# Altium PCB 转接板.PcbDoc
Units mil, origin at the board's own origin, x right, y up, seen from the top; angles counter-clockwise.
Board outline 1968.5 x 1968.5 mil, 2 copper layers (Top Layer, Bottom Layer); 7 components, 9 nets, 101 pads, 30 vias.
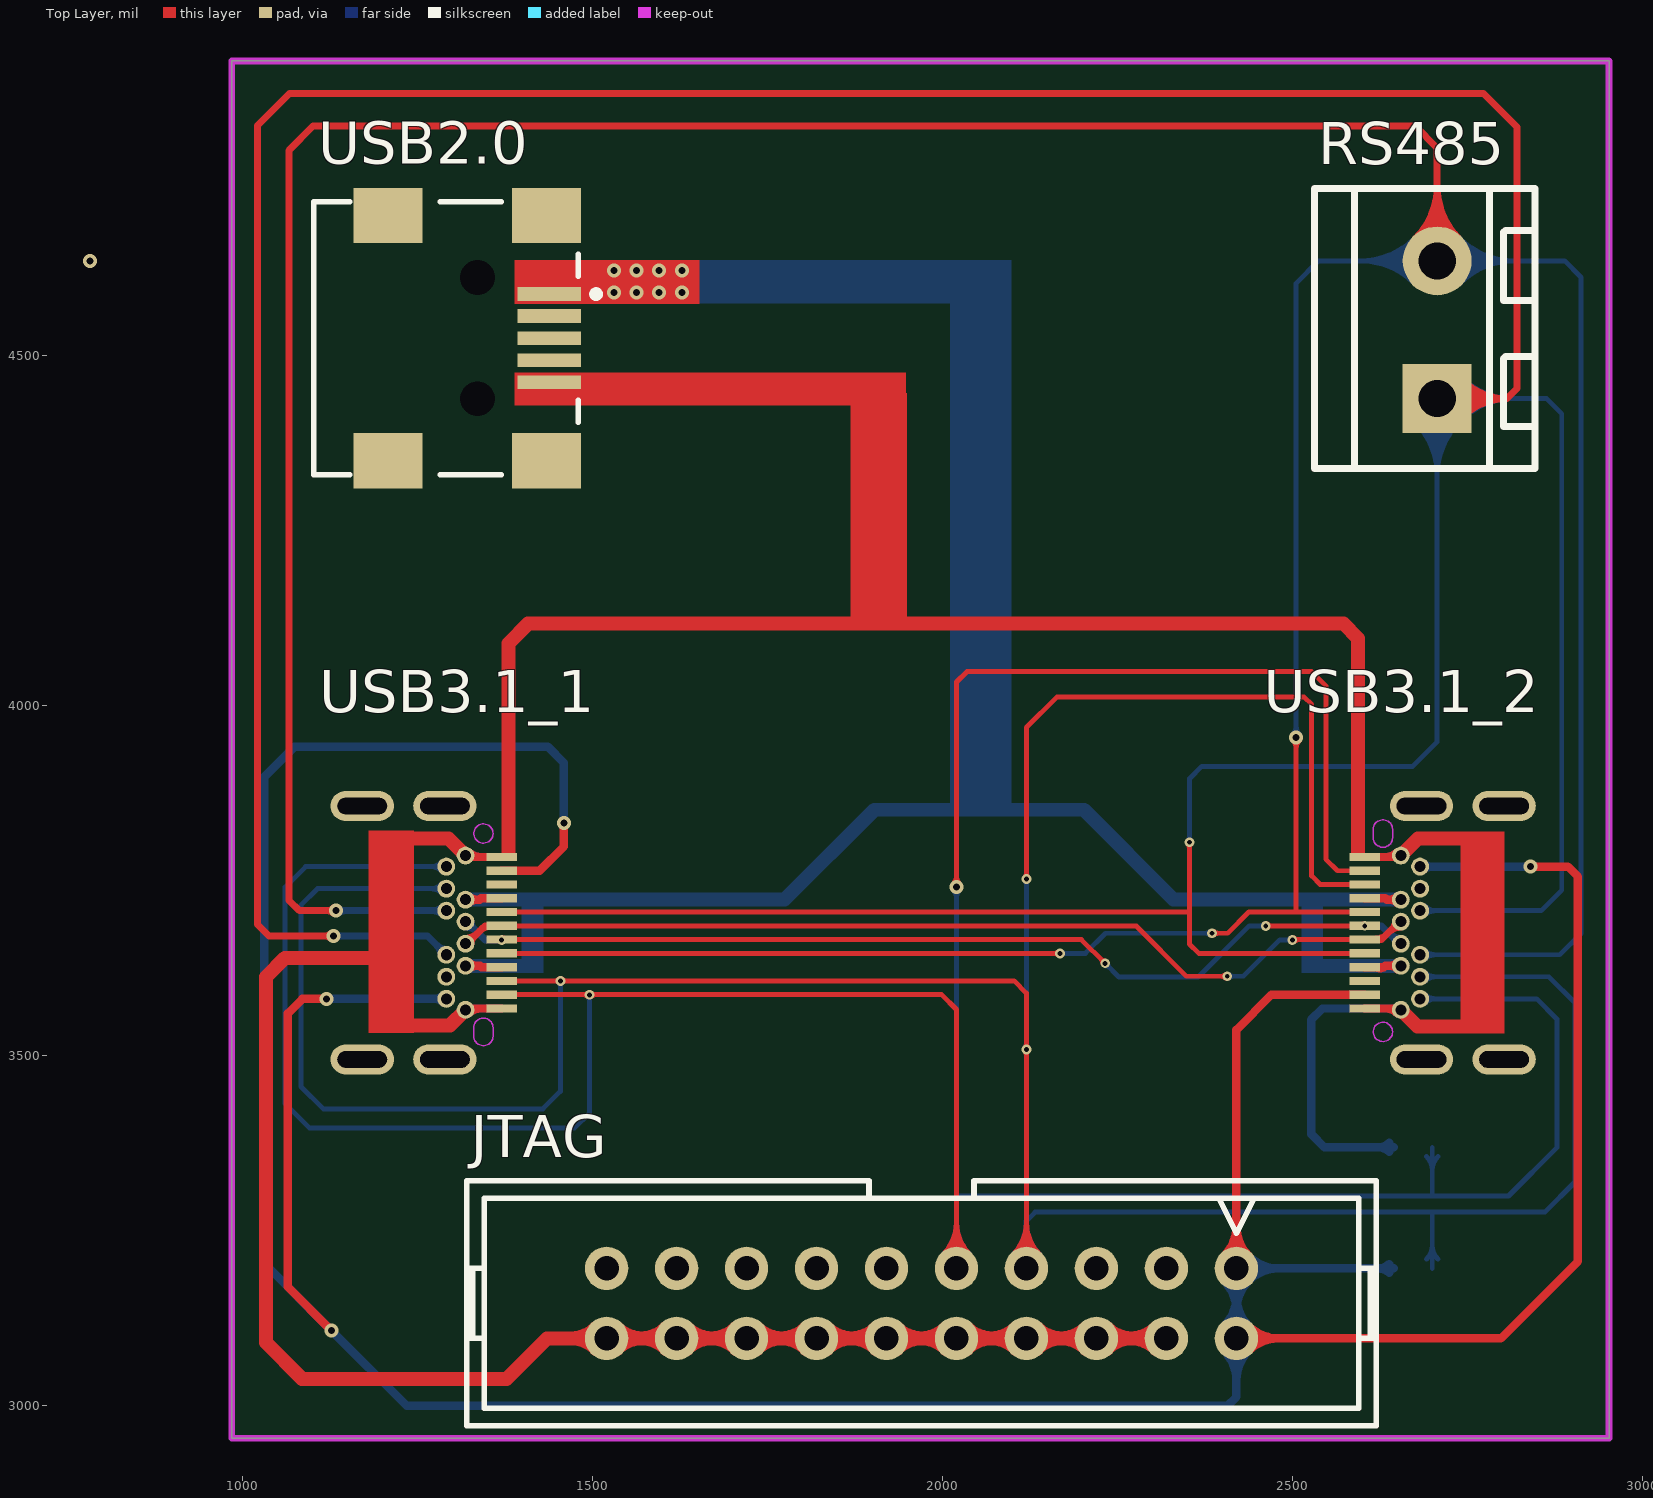
[diagram p0: Top Layer view]
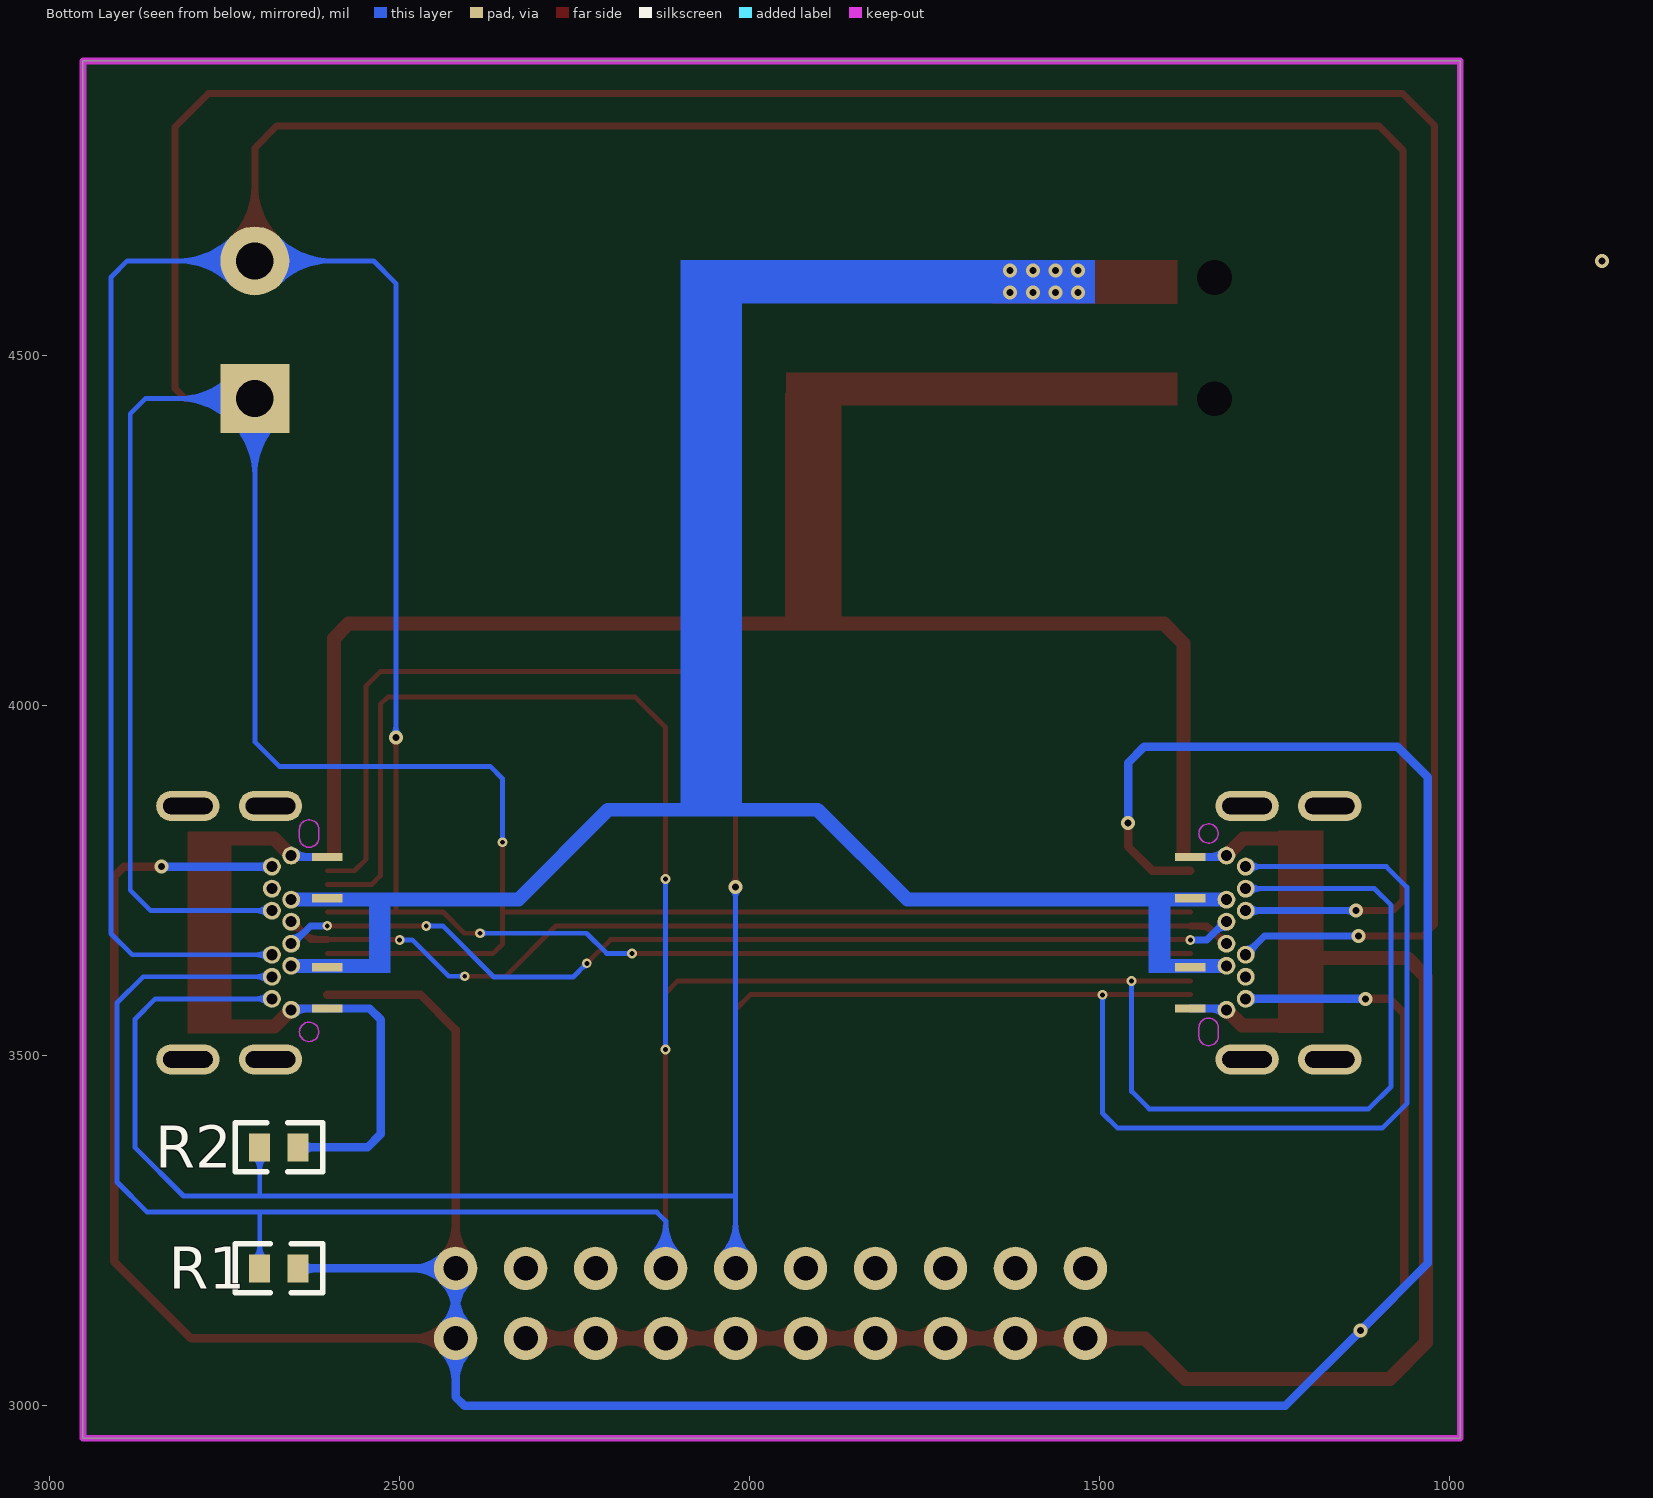
[diagram p1: Bottom Layer view, seen from below]

## Layer stack, top to bottom
Top Layer: signal copper 1.4
Dielectric: dielectric 12.6, FR-4, Dk 4.8
Bottom Layer: signal copper 1.4

## Board outline
984.25,2952.76 2952.76,2952.76 2952.76,4921.26 984.25,4921.26

## Design rules (kind name [scope] priority, off if disabled: settings)
Clearance [All] p1: gap=5.9
ComponentClearance [All] p1: gap=0 collisioncheckmode=3 verticalgap=0 showdistances=FALSE
HoleSize [All] p1: absolutevalues=TRUE maxlimit=200 minlimit=1 maxpercent=80.000 minpercent=20.000
HoleToHoleClearance [All] p1: gap=0 allowstackedmicrovias=TRUE
MinimumSolderMaskSliver [All] p1: minsoldermaskwidth=0
PolygonConnect [All] p1: connectstyle=Relief reliefconductorwidth=10 reliefentries=4 polygonreliefangle="90 Angle"
RoutingCorners [All] p1: cornerstyle=45-Degree minsetback=100 maxsetback=50
RoutingVias [All] p1: holewidth=10 width=20 viastyle="Through Hole" minholewidth=7 minwidth=10 maxholewidth=28 maxwidth=50
SilkToSilkClearance [All] p1: silktosilkclearance=0
SilkscreenOverComponentPads [All] p1: minsilkscreentomaskgap=0
SolderMaskExpansion [All] p1: expansion=4
TestPointUsage [All] p1: valid=0 allowmultiple=FALSE
Testpoint [All] p1: side=15 testpointundercomponent=TRUE minsize=40 maxsize=100 preferedsize=60 minholesize=0 maxholesize=40 preferedholesize=32 testpointgrid=1 style=1023 order=0123456789
Width [All] p1: maxlimit=100 minlimit=6 preferedwidth=10
17 further rules are at their usual default settings.

## Components (designator, comment, footprint, x,y, rotation, side; value= is the part's Value field where it differs from the comment)
JTAG "Header 10X2" JTAG_20 1970,3145.5 r180 top
R1 "Res2" 0603 2645,3195.5 r0 bottom
R2 "Res2" 0603 2700,3368.5 r180 bottom
RS485 "PIN2" HEAD2L-0.8 2707,4438.57 r90 top
USB2.0 "USB" USB/SM0.8-6H5 1128.99,4525 r180 top
USB3.1_1 "USB3.1 TYPEC" "MicroUSB TypeC 3.1 - duplicate" 1344,3783.54 r270 top
USB3.1_2 "USB3.1 TYPEC" "MicroUSB TypeC 3.1 - duplicate" 2629.5,3567 r90 top

## Footprints (in the part's own frame and the unit in brackets; to place one, negate y for a bottom-side part, rotate by r counter-clockwise, add the part's x,y. Pads: shape width x height; smd on the part's side, far side on the other; paste and mask are expansions set on the pad)
0603 [mil]
  rect 30x40 smd: 1(0,0) 2(55,0)
  silkscreen extent -35,-35 90,35
HEAD2L-0.8 [mm]
  rect 2.5x2.5 hole 1.35: 1(0,0)
  round 2.5 hole 1.35: 2(5,0)
  silkscreen extent -2.54,-3.56 7.62,4.45
JTAG_20 [mil]
  round 62 hole 35: 1(-450,-50) 2(-450,50) 3(-350,-50) 4(-350,50) 5(-250,-50) 6(-250,50) 7(-150,-50) 8(-150,50) 9(-50,-50) 10(-50,50) 11(50,-50) 12(50,50) 13(150,-50) 14(150,50) 15(250,-50) 16(250,50) 17(350,-50) 18(350,50) 19(450,-50) 20(450,50)
  silkscreen extent -650,-175 650,175
"MicroUSB TypeC 3.1 - duplicate" [mm]
  rect 0.3x1.1 smd far side: 1(0,0.66) 4(1.5,0.66) 9(4,0.66) 12(5.5,0.66)
  rect 0.3x1.1 smd: 1(0,0.66) 2(0.5,0.66) 3(1,0.66) 4(1.5,0.66) 5(2,0.66) 6(2.5,0.66) 7(3,0.66) 8(3.5,0.66) 9(4,0.66) 10(4.5,0.66) 11(5,0.66) 12(5.5,0.66)
  round 0.65 hole 0.4: 13(-0.05,-0.65) 14(0.35,-1.35) 15(1.15,-1.35) 16(1.55,-0.65) 17(1.95,-1.35) 18(2.35,-0.65) 19(3.15,-0.65) 20(3.55,-1.35) 21(3.95,-0.65) 22(4.35,-1.35) 23(5.15,-1.35) 24(5.55,-0.65)
  oval 1.1x2.3 hole 0.6 slot 1.8 at 90 deg: ""(-1.85,-1.4) ""(-1.85,-4.4) ""(7.35,-1.4) ""(7.35,-4.4)
  Keep-Out Layer circle w0.05: c-0.85,0 r0.35
  Keep-Out Layer lines w0.05: 6.5,-0.35 ccw(c6.5,0) 6.5,0.35 6.2,0.35 ccw(c6.2,0) 6.2,-0.35 6.5,-0.35
USB/SM0.8-6H5 [mm]
  rect 2.3x0.5 smd: 1(-7.85,-1.6) 2(-7.85,-0.8) 3(-7.85,0) 4(-7.85,0.8) 5(-7.85,1.6)
  rect 2.5x2 smd: 6(-7.75,4.45) 7(-1.996,4.45) 8(-7.75,-4.45) 9(-1.996,-4.45)
  round 0.6 hole 1.27 unplated: MH1(-5.25,2.2) MH2(-5.25,-2.2)
  silkscreen extent -9.68,-4.95 0.7,4.95

## Part data
JTAG: "Header, 10-Pin, Dual row"
R1 R2: "Resistor"
USB2.0: library part USB5
USB3.1_1 USB3.1_2: library part "USB3.1 TYPEc"

## Via types
v1: diameter 20, hole 10, Top Layer to Bottom Layer, 17 vias
v2: diameter 14, hole 7, Top Layer to Bottom Layer, 13 vias

## Nets (pads, with @x,y where several pads share a name; then routed paths per layer and width w, separated by ;. In a path a pad name is that pad's centre, name@x,y a point inside that pad or via, vN(x,y) a via of type N, cw(c..) or ccw(c..) an arc to the next point about the centre after c; other vN are vias at no path point)
D+: USB3.1_1.6 USB3.1_1.19 USB3.1_2.6 USB3.1_2.19 | length 1571.4
  Top Layer w7: USB3.1_1.6 2277.39,3685.11 ; 2277.39,3684.11 2348.5,3613 v2(2407,3613) ; v2@2404.53,3610.53 ccw(c2398.55,3604.55) 2398.55,3613 ccw(c2398.55,3621.45) v2@2404.53,3615.47 ; v2@2497.43,3665.43 USB3.1_2.6 ; v2@2502.47,3662.53 cw(c2509.48,3655.52) 2509.48,3665.43 ; v2@2502.47,3667.47 ccw(c2507.42,3672.42) 2507.42,3665.43
  Top Layer w10: USB3.1_1.19 1320.42,3659.52 1346.01,3685.11 USB3.1_1.6 ; USB3.1_1.19@1318.41,3667.32 ccw(c1318.41,3691) 1335.16,3674.25 ; USB3.1_1.19@1326.2,3659.52 cw(c1340.16,3659.52) 1330.29,3669.39 ; 1338.65,3677.75 cw(c1354.24,3662.17) USB3.1_1.6@1354.24,3684.2 ; 1341.9,3681 cw(c1350.75,3672.15) USB3.1_1.6@1354,3684.24 ; USB3.1_2.6 2627.49,3665.43 2653.08,3691.02 USB3.1_2.19 ; USB3.1_2.6@2619.26,3666.33 ccw(c2619.26,3688.37) 2634.85,3672.78 ; 2638.34,3676.28 cw(c2655.09,3659.54) USB3.1_2.19@2655.09,3683.22 ; 2643.21,3681.15 ccw(c2633.34,3691.02) USB3.1_2.19@2647.3,3691.02
  Bottom Layer w7: v2(2407,3613) 2430,3613 2482,3665 v2(2500,3665) ; v2@2409.47,3610.53 cw(c2415.45,3604.55) 2415.45,3613 cw(c2415.45,3621.45) v2@2409.47,3615.47 ; v2@2497.53,3662.53 ccw(c2491.55,3656.55) 2491.55,3665 ccw(c2491.55,3673.45) v2@2497.53,3667.47
D-: USB3.1_1.7 USB3.1_1.18 USB3.1_2.7 USB3.1_2.18 | length 1557.1
  Top Layer w7: USB3.1_1.7 1918,3665.43 ; USB3.1_1.7@1372.47,3662.53 cw(c1379.48,3655.52) USB3.1_1.7@1379.48,3665.43 ; USB3.1_1.7@1372.47,3667.47 ccw(c1377.42,3672.42) USB3.1_1.7@1377.42,3665.43 ; 1925.93,3665.43 1918,3665.43 ; v2@2229,3631.5 ccw(c2220.55,3631.5) 2226.53,3637.47 ccw(c2232.5,3643.45) v2@2232.5,3635 ; v2(2232.5,3631.5) 2198.57,3665.43 1918,3665.43 ; v2@2462,3685.11 v2(2603.52,3685.11) ; v2@2464.47,3682.53 cw(c2470.72,3676.28) 2470.72,3685.11 ; v2@2464.47,3687.47 ccw(c2470.18,3693.18) 2470.18,3685.11 ; USB3.1_2.7@2601.04,3682.64 ccw(c2595.07,3676.66) 2595.07,3685.11 ccw(c2595.07,3693.56) USB3.1_2.7@2601.04,3687.59
  Bottom Layer w7: v2@2232.5,3628 cw(c2232.5,3619.55) 2238.47,3625.53 cw(c2244.45,3631.5) v2@2236,3631.5 ; v2(2232.5,3631.5) 2252,3612 2365.5,3612 2438.5,3685 v2(2462,3685) ; v2@2459.53,3682.53 ccw(c2453.55,3676.55) 2453.55,3685 ccw(c2453.55,3693.45) v2@2459.53,3687.47
  Bottom Layer w10: USB3.1_1.18@1318.41,3683.22 cw(c1318.41,3659.39) 1335.26,3676.24 ; USB3.1_1.18 1320.48,3691.02 1346.5,3665 v2(1370,3665) ; USB3.1_1.18@1326.2,3691.02 ccw(c1340.02,3691.02) 1330.25,3681.25 ; v2(2603.52,3685.11) 2627.49,3685.11 2653.08,3659.52 USB3.1_2.18 ; 2638.34,3674.25 ccw(c2655.09,3691) USB3.1_2.18@2655.09,3667.32 ; 2643.21,3669.39 cw(c2633.34,3659.52) USB3.1_2.18@2647.3,3659.52
GND: JTAG.4 JTAG.6 JTAG.8 JTAG.10 JTAG.12 JTAG.14 JTAG.16 JTAG.18 JTAG.20 R2.2 USB2.0.5 USB3.1_1.1 USB3.1_1.12 USB3.1_1.13 USB3.1_1.24 USB3.1_2.1 USB3.1_2.12 USB3.1_2.13 USB3.1_2.24 | length 6659.7
  Top Layer w12: USB3.1_1.13 1320.38,3783.54 USB3.1_1.1@1369.98,3783.54 ; USB3.1_1.24@1319,3565.62 USB3.1_1.24 1320.38,3567 USB3.1_1.12@1369.98,3567 ; USB3.1_1.24@1323.21,3560.23 cw(c1339.57,3543.87) 1339.57,3567 ; USB3.1_1.13@1323.21,3790.31 ccw(c1339.57,3806.66) 1339.57,3783.54 ; USB3.1_2.1@2603.52,3567 2653.12,3567 USB3.1_2.13 ; USB3.1_2.12@2603.52,3783.54 2653.12,3783.54 USB3.1_2.24 ; 2633.93,3567 cw(c2633.93,3543.87) USB3.1_2.13@2650.29,3560.23 ; 2633.93,3783.54 ccw(c2633.93,3806.66) USB3.1_2.24@2650.29,3790.31
  Top Layer w20: 1201.5,3639 1060,3639 1033,3612 1033,3089.5 1085,3037.5 1377,3037.5 1435,3095.5 JTAG.18 JTAG.14 JTAG.12 JTAG.10 JTAG.8 JTAG.4 ; 1237,3810 1293.91,3810 USB3.1_1.13 ; 1240,3543 1296.38,3543 USB3.1_1.24 ; USB3.1_1.1@1379.66,3787.71 1379.66,4088.66 1408,4117 2573,4117 2594,4096 USB3.1_2.12@2594,3788 ; JTAG.20@1505.15,3080.65 ccw(c1469.3,3044.8) 1469.3,3095.5 ccw(c1469.3,3146.2) JTAG.20@1505.15,3110.35 ; JTAG.20@1534.85,3080.65 cw(c1570.7,3044.8) 1570.7,3095.5 cw(c1570.7,3146.2) JTAG.20@1534.85,3110.35 ; JTAG.18@1605.15,3080.65 ccw(c1569.3,3044.8) 1569.3,3095.5 ccw(c1569.3,3146.2) JTAG.18@1605.15,3110.35 ; JTAG.18@1634.85,3080.65 cw(c1670.7,3044.8) 1670.7,3095.5 cw(c1670.7,3146.2) JTAG.18@1634.85,3110.35 ; JTAG.16@1705.15,3080.65 ccw(c1669.3,3044.8) 1669.3,3095.5 ccw(c1669.3,3146.2) JTAG.16@1705.15,3110.35 ; JTAG.16@1734.85,3080.65 cw(c1770.7,3044.8) 1770.7,3095.5 cw(c1770.7,3146.2) JTAG.16@1734.85,3110.35 ; JTAG.14@1805.15,3080.65 ccw(c1769.3,3044.8) 1769.3,3095.5 ccw(c1769.3,3146.2) JTAG.14@1805.15,3110.35 ; JTAG.14@1834.85,3080.65 cw(c1870.7,3044.8) 1870.7,3095.5 cw(c1870.7,3146.2) JTAG.14@1834.85,3110.35 ; JTAG.12@1905.15,3080.65 ccw(c1869.3,3044.8) 1869.3,3095.5 ccw(c1869.3,3146.2) JTAG.12@1905.15,3110.35 ; JTAG.12@1934.85,3080.65 cw(c1970.7,3044.8) 1970.7,3095.5 cw(c1970.7,3146.2) JTAG.12@1934.85,3110.35 ; JTAG.10@2005.15,3080.65 ccw(c1969.3,3044.8) 1969.3,3095.5 ccw(c1969.3,3146.2) JTAG.10@2005.15,3110.35 ; JTAG.10@2034.85,3080.65 cw(c2070.7,3044.8) 2070.7,3095.5 cw(c2070.7,3146.2) JTAG.10@2034.85,3110.35 ; JTAG.8@2105.15,3080.65 ccw(c2069.3,3044.8) 2069.3,3095.5 ccw(c2069.3,3146.2) JTAG.8@2105.15,3110.35 ; JTAG.8@2134.85,3080.65 cw(c2170.7,3044.8) 2170.7,3095.5 cw(c2170.7,3146.2) JTAG.8@2134.85,3110.35 ; JTAG.6@2205.15,3080.65 ccw(c2169.3,3044.8) 2169.3,3095.5 ccw(c2169.3,3146.2) JTAG.6@2205.15,3110.35 ; JTAG.6@2234.85,3080.65 cw(c2270.7,3044.8) 2270.7,3095.5 cw(c2270.7,3146.2) JTAG.6@2234.85,3110.35 ; JTAG.4@2305.15,3080.65 ccw(c2269.3,3044.8) 2269.3,3095.5 ccw(c2269.3,3146.2) JTAG.4@2305.15,3110.35 ; USB3.1_2.13 2679.12,3541 2784.5,3541 ; USB3.1_2.24 2679.59,3810 2782,3810
  Bottom Layer w12: USB3.1_1.24 1320.38,3567 USB3.1_1.12@1369.98,3567 ; USB3.1_1.13 1320.38,3783.54 USB3.1_1.1@1369.98,3783.54 ; USB3.1_1.24@1323.21,3560.23 cw(c1339.57,3543.87) 1339.57,3567 ; USB3.1_1.13@1323.21,3790.31 ccw(c1339.57,3806.66) 1339.57,3783.54 ; USB3.1_2.12@2603.52,3783.54 2653.12,3783.54 USB3.1_2.24 ; 2633.93,3567 cw(c2633.93,3543.87) USB3.1_2.13@2650.29,3560.23 ; 2633.93,3783.54 ccw(c2633.93,3806.66) USB3.1_2.24@2650.29,3790.31 ; R2.2@2638.64,3362.14 ccw(c2623.27,3346.77) 2623.27,3368.5 ccw(c2623.27,3390.23) R2.2@2638.64,3374.86 ; R2.2 2546,3368.5 2527,3387.5 2527,3551 2543,3567 2603.52,3567 2653.12,3567 USB3.1_2.13
RS485_A: RS485.1 USB3.1_1.5 USB3.1_1.20 USB3.1_2.5 USB3.1_2.20 | length 8733.9
  Top Layer w7: USB3.1_1.5 2353,3704.8 ; v2@2350.53,3802.03 cw(c2344.55,3796.05) 2353,3796.05 cw(c2361.45,3796.05) v2@2355.47,3802.03 ; 2353,3706 2353,3704.8 ; 2353,3706.5 v2(2353,3804.5) ; USB3.1_2.5 2366.26,3645.74 2353,3659 2353,3704.8
  Top Layer w10: v1@1125.96,3666.96 ccw(c1117.43,3658.43) 1117.43,3670.5 ccw(c1117.43,3682.57) v1@1125.96,3674.04 ; v1(1129.5,3670.5) 1037.5,3670.5 1021,3687 1021,4829 1066.5,4874.5 2773,4874.5 2821,4826.5 2821,4453 2806.57,4438.57 ; RS485.1 2806.57,4438.57 ; RS485.1@2724.97,4422.33 cw(c2761.53,4389.29) 2761.53,4438.57 cw(c2761.53,4487.85) RS485.1@2724.97,4454.8 ; RS485.1@2732.39,4415.62 cw(c2784.04,4368.93) 2784.04,4438.57 cw(c2784.04,4508.2) RS485.1@2732.39,4461.51 ; RS485.1@2739.8,4408.92 cw(c2806.56,4348.58) 2806.56,4438.57 ; RS485.1@2739.8,4468.21 ccw(c2806.56,4528.55) 2806.56,4438.57
  Bottom Layer w7: v2@2350.53,3806.97 ccw(c2344.55,3812.95) 2353,3812.95 ccw(c2361.45,3812.95) v2@2355.47,3806.97 ; v2@2354,3803.5 v2(2353,3804.5) 2353,3895.5 2370.5,3913 2672,3913 2707,3948 RS485.1 2863.43,4438.57 2885,4417 2885,3736 2855.76,3706.76 USB3.1_2.20 ; RS485.1@2674.68,4406.24 cw(c2596.64,4328.21) 2707,4328.21 cw(c2817.36,4328.21) 2739.33,4406.24 cw(c2817.36,4328.21) 2817.36,4438.57 cw(c2817.36,4548.93) RS485.1@2739.33,4470.89 ; RS485.1@2679.63,4411.19 cw(c2613.54,4345.11) 2707,4345.11 cw(c2800.46,4345.11) 2734.38,4411.19 cw(c2800.46,4345.11) 2800.46,4438.57 cw(c2800.46,4532.03) RS485.1@2734.38,4465.94 ; RS485.1@2684.58,4416.14 cw(c2630.44,4362.01) 2707,4362.01 cw(c2783.56,4362.01) 2729.43,4416.14 cw(c2783.56,4362.01) 2783.56,4438.57 cw(c2783.56,4515.13) RS485.1@2729.43,4460.99 ; USB3.1_2.20@2689.22,3700.19 cw(c2705.09,3684.32) 2705.09,3706.76 cw(c2705.09,3729.2) USB3.1_2.20@2689.22,3713.34 ; RS485.1@2689.53,4421.09 cw(c2647.34,4378.9) 2707,4378.9 cw(c2766.67,4378.9) 2724.48,4421.09 cw(c2766.67,4378.9) 2766.67,4438.57 cw(c2766.67,4498.23) RS485.1@2724.48,4456.04
  Bottom Layer w10: v1(1129.5,3670.5) 1264.12,3670.5 USB3.1_1.20 ; v1@1133.04,3666.96 cw(c1141.57,3658.43) 1141.57,3670.5 cw(c1141.57,3682.57) v1@1133.04,3674.04 ; USB3.1_1.20@1283.06,3643.77 ccw(c1264.24,3643.77) 1277.54,3657.08 ccw(c1290.85,3670.39) USB3.1_1.20@1290.85,3651.57
RS485_B: RS485.2 USB3.1_1.8 USB3.1_1.17 USB3.1_2.8 USB3.1_2.17 | length 8562.3
  Top Layer w7: USB3.1_1.8 v2@2168,3645.74 ; 2158.97,3645.74 cw(c2158.97,3636.47) v2@2165.53,3643.03 ; 2160.13,3645.74 ccw(c2160.13,3653.37) v2@2165.53,3647.97 ; v2(2385,3674.5) 2407.5,3674.5 2437.8,3704.8 2505.5,3704.8 ; v2@2387.47,3672.03 cw(c2393.45,3666.05) 2393.45,3674.5 cw(c2393.45,3682.95) v2@2387.47,3676.97 ; v1@2500.9,3949.9 cw(c2489.81,3938.81) 2505.5,3938.81 cw(c2521.19,3938.81) v1@2510.1,3949.9 ; v1(2505.5,3954.5) 2505.5,3704.8 ; USB3.1_2.8 2505.5,3704.8
  Top Layer w10: v1@1129.96,3703.23 ccw(c1121.43,3694.69) 1121.43,3706.76 ccw(c1121.43,3718.84) v1@1129.96,3710.3 ; v1(1133.5,3706.76) 1080.74,3706.76 1066,3721.5 1066,4793.5 1100.5,4828 2676,4828 2707,4797 RS485.2 ; RS485.2@2675.74,4666.68 ccw(c2600.27,4742.16) 2707,4742.16 ccw(c2813.74,4742.16) RS485.2@2738.27,4666.68 ; RS485.2@2682.81,4659.61 ccw(c2624.41,4718.01) 2707,4718.01 ccw(c2789.6,4718.01) RS485.2@2731.2,4659.61 ; RS485.2@2689.88,4652.54 ccw(c2648.55,4693.87) 2707,4693.87 ccw(c2765.46,4693.87) RS485.2@2724.12,4652.54
  Bottom Layer w7: v2@2168,3645.74 2204.24,3645.74 2233,3674.5 v2(2385,3674.5) ; v2@2170.47,3643.03 cw(c2177.03,3636.47) 2177.03,3645.74 ; v2@2170.47,3647.97 ccw(c2175.87,3653.37) 2175.87,3645.74 ; v2@2382.53,3672.03 ccw(c2376.55,3666.05) 2376.55,3674.5 ccw(c2376.55,3682.95) v2@2382.53,3676.97 ; v1@2500.9,3959.1 ccw(c2489.81,3970.19) 2505.5,3970.19 ccw(c2521.19,3970.19) v1@2510.1,3959.1 ; v1(2505.5,3954.5) 2505.5,4603.5 2537.42,4635.42 RS485.2 2889.08,4635.42 2912.5,4612 2912.5,3674 2882.27,3643.77 USB3.1_2.17 ; RS485.2@2674.68,4603.09 ccw(c2596.64,4525.06) 2596.64,4635.42 ccw(c2596.64,4745.78) RS485.2@2674.68,4667.74 ; RS485.2@2679.63,4608.04 ccw(c2613.54,4541.96) 2613.54,4635.42 ccw(c2613.54,4728.88) RS485.2@2679.63,4662.79 ; RS485.2@2684.58,4612.99 ccw(c2630.44,4558.86) 2630.44,4635.42 ccw(c2630.44,4711.98) RS485.2@2684.58,4657.84 ; USB3.1_2.17@2689.22,3637.2 cw(c2705.09,3621.33) 2705.09,3643.77 cw(c2705.09,3666.21) USB3.1_2.17@2689.22,3650.34 ; RS485.2@2689.53,4617.94 ccw(c2647.34,4575.76) 2647.34,4635.42 ccw(c2647.34,4695.08) RS485.2@2689.53,4652.89 ; RS485.2@2724.48,4617.94 cw(c2766.67,4575.76) 2766.67,4635.42 cw(c2766.67,4695.08) RS485.2@2724.48,4652.89 ; RS485.2@2729.43,4612.99 cw(c2783.56,4558.86) 2783.56,4635.42 cw(c2783.56,4711.98) RS485.2@2729.43,4657.84 ; RS485.2@2734.38,4608.04 cw(c2800.46,4541.96) 2800.46,4635.42 cw(c2800.46,4728.88) RS485.2@2734.38,4662.79 ; RS485.2@2739.33,4603.09 cw(c2817.36,4525.06) 2817.36,4635.42 cw(c2817.36,4745.78) RS485.2@2739.33,4667.74
  Bottom Layer w10: v1(1133.5,3706.76) USB3.1_1.17 ; v1@1137.04,3703.23 cw(c1145.57,3694.69) 1145.57,3706.76 cw(c1145.57,3718.84) v1@1137.04,3710.3 ; USB3.1_1.17@1285.34,3701.25 ccw(c1272.03,3687.94) 1272.03,3706.76 ccw(c1272.03,3725.58) USB3.1_1.17@1285.34,3712.28
  other v2: 2168,3645.5
SWCLK: JTAG.9 R2.1 USB3.1_1.11 USB3.1_1.14 USB3.1_2.11 USB3.1_2.14 | length 5913.8
  Top Layer w7: USB3.1_1.11 1998.81,3586.69 2020,3565.5 JTAG.9 ; 1486.6,3586.69 cw(c1486.6,3577.6) v2@1493.03,3584.03 ; 1487.5,3586.69 ccw(c1487.5,3594.5) v2@1493.03,3588.97 ; v2@1497.97,3584.03 cw(c1504.4,3577.6) 1504.4,3586.69 ; v2@1497.97,3588.97 ccw(c1503.5,3594.5) 1503.5,3586.69 ; JTAG.9@2000.55,3214.95 ccw(c1953.61,3261.89) 2020,3261.89 ccw(c2086.39,3261.89) JTAG.9@2039.45,3214.95 ; JTAG.9@2005.5,3210 ccw(c1970.51,3244.99) 2020,3244.99 ccw(c2069.49,3244.99) JTAG.9@2034.5,3210 ; JTAG.9@2010.45,3205.05 ccw(c1987.41,3228.09) 2020,3228.09 ccw(c2052.59,3228.09) JTAG.9@2029.55,3205.05 ; v1@2015.4,3745.1 ccw(c2004.31,3756.19) 2020,3756.19 ccw(c2035.69,3756.19) v1@2024.6,3745.1 ; v1(2020,3740.5) 2020,4033.5 2035,4048.5 2527.5,4048.5 2548,4028 2548,3780.5 2564.65,3763.85 USB3.1_2.11
  Bottom Layer w7: USB3.1_1.14@1284.28,3763.18 ccw(c1268.41,3747.32) 1268.41,3769.76 ccw(c1268.41,3792.2) USB3.1_1.14@1284.28,3776.33 ; USB3.1_1.14 1089.76,3769.76 1060.5,3740.5 1060.5,3431 1095.5,3396 1474,3396 1495.5,3417.5 v2(1495.5,3586.5) ; v2@1493.03,3584.03 cw(c1487.05,3578.05) 1495.5,3578.05 cw(c1503.95,3578.05) v2@1497.97,3584.03 ; JTAG.9@2000.55,3214.95 ccw(c1953.61,3261.89) 2020,3261.89 ccw(c2086.39,3261.89) JTAG.9@2039.45,3214.95 ; JTAG.9@2005.5,3210 ccw(c1970.51,3244.99) 2020,3244.99 ccw(c2069.49,3244.99) JTAG.9@2034.5,3210 ; JTAG.9@2010.45,3205.05 ccw(c1987.41,3228.09) 2020,3228.09 ccw(c2052.59,3228.09) JTAG.9@2029.55,3205.05 ; v1@2015.4,3735.9 cw(c2004.31,3724.81) 2020,3724.81 cw(c2035.69,3724.81) v1@2024.6,3735.9 ; JTAG.9 2020,3299 ; v1(2020,3740.5) 2020,3299 ; USB3.1_2.14 2849.22,3580.78 2878,3552 2878,3368 2809,3299 2020,3299 ; USB3.1_2.14@2689.22,3574.21 cw(c2705.09,3558.34) 2705.09,3580.78 cw(c2705.09,3603.22) USB3.1_2.14@2689.22,3587.35 ; R2.1@2691.87,3355.37 cw(c2672.24,3335.74) 2700,3335.74 cw(c2727.76,3335.74) R2.1@2708.13,3355.37 ; 2700,3301 R2.1
SWDIO: JTAG.7 R1.2 USB3.1_1.10 USB3.1_1.15 USB3.1_2.10 USB3.1_2.15 | length 5537.5
  Top Layer w7: USB3.1_1.10 v2(1454,3606.37) 2102.63,3606.37 2120,3589 v2(2120,3508.5) JTAG.7 ; v2@1451.53,3603.9 ccw(c1445.55,3597.92) 1445.55,3606.37 ccw(c1445.55,3614.82) v2@1451.53,3608.84 ; v2@1456.47,3603.9 cw(c1462.45,3597.92) 1462.45,3606.37 cw(c1462.45,3614.82) v2@1456.47,3608.84 ; JTAG.7@2100.55,3214.95 ccw(c2053.61,3261.89) 2120,3261.89 ccw(c2186.39,3261.89) JTAG.7@2139.45,3214.95 ; JTAG.7@2105.5,3210 ccw(c2070.51,3244.99) 2120,3244.99 ccw(c2169.49,3244.99) JTAG.7@2134.5,3210 ; JTAG.7@2110.45,3205.05 ccw(c2087.41,3228.09) 2120,3228.09 ccw(c2152.59,3228.09) JTAG.7@2129.55,3205.05 ; v2@2117.53,3506.03 cw(c2111.55,3500.05) 2120,3500.05 cw(c2128.45,3500.05) v2@2122.47,3506.03 ; v2@2117.53,3510.97 ccw(c2111.55,3516.95) 2120,3516.95 ccw(c2128.45,3516.95) v2@2122.47,3510.97 ; v2@2117.53,3754.47 ccw(c2111.55,3760.45) 2120,3760.45 ccw(c2128.45,3760.45) v2@2122.47,3754.47 ; v2(2120,3752) 2120,3968.5 2163.5,4012 2206,4012 ; 2198,4012 2206,4012 ; USB3.1_2.10 2539.83,3744.17 2527.5,3756.5 2527.5,4001.5 2517,4012 2206,4012
  Bottom Layer w7: USB3.1_1.15@1284.28,3731.69 ccw(c1268.41,3715.82) 1268.41,3738.26 ccw(c1268.41,3760.7) USB3.1_1.15@1284.28,3744.83 ; USB3.1_1.15 1106.76,3738.26 1083,3714.5 1083,3455.5 1115,3423.5 1429,3423.5 1454,3448.5 v2(1454,3606.37) ; v2@1451.53,3603.9 cw(c1445.55,3597.92) 1454,3597.92 cw(c1462.45,3597.92) v2@1456.47,3603.9 ; JTAG.7@2100.55,3214.95 ccw(c2054.82,3260.68) 2119.5,3260.68 ; JTAG.7@2105.5,3210 ccw(c2071.72,3243.78) 2119.5,3243.78 ; JTAG.7@2110.45,3205.05 ccw(c2088.62,3226.88) 2119.5,3226.88 ; v2@2117.53,3510.97 ccw(c2111.55,3516.95) 2120,3516.95 ccw(c2128.45,3516.95) v2@2122.47,3510.97 ; v2@2117.53,3749.53 cw(c2111.55,3743.55) 2120,3743.55 cw(c2128.45,3743.55) v2@2122.47,3749.53 ; 2119.5,3229.25 ccw(c2153.68,3229.25) JTAG.7@2129.54,3205.06 ; 2119.5,3246.12 ccw(c2170.51,3246.12) JTAG.7@2134.48,3210.01 ; JTAG.7 2119.5,3196 2119.5,3263 ; v2(2120,3508.5) v2(2120,3752) ; JTAG.7@2139.42,3214.97 cw(c2187.35,3263) 2119.5,3263 ; USB3.1_2.15 2866.72,3612.28 2904,3575 2904,3319 2861,3276 2132.5,3276 2119.5,3263 ; USB3.1_2.15@2689.22,3605.7 cw(c2705.09,3589.83) 2705.09,3612.28 cw(c2705.09,3634.72) USB3.1_2.15@2689.22,3618.85 ; R1.2@2691.87,3208.63 ccw(c2672.24,3228.26) 2700,3228.26 ccw(c2727.76,3228.26) R1.2@2708.13,3208.63 ; R1.2 2700,3274.5
VCC3.3: JTAG.1 JTAG.2 R1.1 USB3.1_1.2 USB3.1_1.23 USB3.1_2.2 USB3.1_2.23 | length 6808.9
  Top Layer w12: v1(1119.78,3580.78) 1085.28,3580.78 1064.5,3560 1064.5,3169 v1(1126.5,3107) ; USB3.1_1.2 1424.35,3763.85 1459,3798.5 v1(1459,3832) ; JTAG.1@2402.32,3213.18 ccw(c2359.64,3255.86) 2420,3255.86 ccw(c2480.36,3255.86) JTAG.1@2437.68,3213.18 ; JTAG.1@2410.81,3204.69 ccw(c2388.62,3226.88) 2420,3226.88 ccw(c2451.38,3226.88) JTAG.1@2429.19,3204.69 ; JTAG.2@2420,3095 JTAG.2 ; JTAG.2@2420,3120 JTAG.2 ; JTAG.1 2420,3536.5 2470.18,3586.68 USB3.1_2.2 ; JTAG.2@2429.19,3086.31 cw(c2451.38,3064.12) 2451.38,3095.5 cw(c2451.38,3126.88) JTAG.2@2429.19,3104.69 ; JTAG.2@2437.68,3077.82 cw(c2480.36,3035.14) 2480.36,3095.5 cw(c2480.36,3155.86) JTAG.2@2437.68,3113.18 ; v1(2840.26,3769.76) 2893.74,3769.76 2908,3755.5 2908,3205.5 2798,3095.5 JTAG.2
  Bottom Layer w12: v1(1119.78,3580.78) USB3.1_1.23 ; USB3.1_1.23@1286.05,3575.97 ccw(c1274.45,3564.37) 1274.45,3580.78 ccw(c1274.45,3597.18) USB3.1_1.23@1286.05,3585.58 ; v1(1459,3832) 1459,3918 1436,3941 1074,3941 1030.5,3897.5 1030.5,3203 v1(1126.5,3107) 1234.5,2999 2407,2999 2420,3012 JTAG.2@2420,3094 ; JTAG.2@2402.32,3077.82 cw(c2359.64,3035.14) 2420,3035.14 cw(c2480.36,3035.14) JTAG.2@2437.68,3077.82 ; JTAG.2@2402.32,3113.18 ccw(c2359.64,3155.86) 2420,3155.86 ccw(c2480.36,3155.86) JTAG.2@2437.68,3113.18 ; JTAG.1@2402.32,3177.82 cw(c2359.64,3135.14) 2420,3135.14 cw(c2480.36,3135.14) 2437.68,3177.82 cw(c2480.36,3135.14) 2480.36,3195.5 cw(c2480.36,3255.86) JTAG.1@2437.68,3213.18 ; JTAG.2@2410.81,3086.31 cw(c2388.62,3064.12) 2420,3064.12 cw(c2451.38,3064.12) JTAG.2@2429.19,3086.31 ; JTAG.2@2410.81,3104.69 ccw(c2388.62,3126.88) 2420,3126.88 ccw(c2451.38,3126.88) JTAG.2@2429.19,3104.69 ; JTAG.1@2410.81,3186.31 cw(c2388.62,3164.12) 2420,3164.12 cw(c2451.38,3164.12) 2429.19,3186.31 cw(c2451.38,3164.12) 2451.38,3195.5 cw(c2451.38,3226.88) JTAG.1@2429.19,3204.69 ; JTAG.2 JTAG.1 R1.1 ; R1.1@2638.64,3189.14 ccw(c2623.27,3173.77) 2623.27,3195.5 ccw(c2623.27,3217.23) R1.1@2638.64,3201.86 ; USB3.1_2.23 v1(2840.26,3769.76) ; USB3.1_2.23@2687.45,3764.95 cw(c2699.05,3753.35) 2699.05,3769.76 cw(c2699.05,3786.16) USB3.1_2.23@2687.45,3774.56
VCC5V: USB2.0.1 USB3.1_1.4 USB3.1_1.9 USB3.1_1.16 USB3.1_1.21 USB3.1_2.4 USB3.1_2.9 USB3.1_2.16 USB3.1_2.21 | length 1983.9
  Top Layer w12: USB3.1_1.21 1338.98,3628.02 1340.94,3626.06 USB3.1_1.9@1369.98,3626.06 ; USB3.1_1.16 1338.51,3722.51 1340.48,3724.48 USB3.1_1.4@1369.98,3724.48 ; USB3.1_1.21@1323.21,3623.22 cw(c1334.81,3611.62) 1334.81,3628.02 cw(c1334.81,3644.43) USB3.1_1.21@1323.21,3632.83 ; USB3.1_1.16@1323.21,3717.71 cw(c1334.81,3706.11) 1334.81,3722.51 cw(c1334.81,3738.92) USB3.1_1.16@1323.21,3727.32 ; USB3.1_2.4@2603.52,3626.06 2631.06,3626.06 2633.02,3628.02 ; USB3.1_2.9@2603.52,3724.48 2633.02,3724.48 2634.99,3722.51 USB3.1_2.21 ; USB3.1_2.4@2619.22,3625.97 ccw(c2624.74,3636.31) 2633.02,3628.02 ; USB3.1_2.16@2650.29,3623.22 ccw(c2638.69,3611.62) 2638.69,3628.02 ccw(c2638.69,3644.43) USB3.1_2.16@2650.29,3632.83 ; USB3.1_2.21@2650.29,3717.71 ccw(c2638.69,3706.11) 2638.69,3722.51 ccw(c2638.69,3738.92) USB3.1_2.21@2650.29,3727.32 ; USB3.1_2.16 2633.02,3628.02
  Bottom Layer w20: USB3.1_1.21 1412.98,3628.02 ; USB3.1_1.16 1774.51,3722.51 1903,3851 2202,3851 2330.49,3722.51 USB3.1_2.21 ; 2536.5,3628.02 USB3.1_2.16
  other v1: 1530.5,4590.5 1562.83,4590.5 1595.17,4590.5 1627.5,4590.5 1530.5,4621.5 1562.83,4621.5 1595.17,4621.5 1627.5,4621.5
pads on no net: JTAG.3 JTAG.5 JTAG.11 JTAG.13 JTAG.15 JTAG.17 JTAG.19 USB2.0.2 USB2.0.3 USB2.0.4 USB2.0.6 USB2.0.7 USB2.0.8 USB2.0.9 USB2.0.MH1 USB2.0.MH2 USB3.1_1. USB3.1_1.3 USB3.1_1.22 USB3.1_2. USB3.1_2.3 USB3.1_2.22
copper on no net:
  other v1: 781.5,4635.5

## Keep-outs
Keep-Out Layer:
  the board outline again, w10

## Other copper
Top Layer:
  rectangle net VCC5V: 1388,4574 1652.5,4637
  rectangle net GND: 1388,4429 1948,4476
  rectangle net GND: 1180,3532 1245,3821
  rectangle net GND: 1868.5,4107 1949,4446.5
  rectangle net GND: 2740.5,3531 2803.5,3820
  pour cut-out: 1095,4752.5 1095,4302.5 1492.5,4302.5 1492.5,4752.5
  pour cut-out: 1073.5,3468 1403.5,3468 1403.5,3883 1073.5,3883
  pour cut-out: 2570,3468 2900,3468 2900,3883 2570,3883
  pour cut-out: 2525,4332.5 2855,4332.5 2855,4747.5 2525,4747.5
Bottom Layer:
  rectangle net VCC5V: 1506,4574.5 2099,4637
  rectangle net VCC5V: 2011,3851 2099,4594.5
  rectangle net VCC5V: 1398.5,3618.02 1429.5,3725.54
  rectangle net VCC5V: 2513,3618.02 2544,3725.54
  pour cut-out: 1095,4752.5 1095,4302.5 1492.5,4302.5 1492.5,4752.5
  pour cut-out: 1073.5,3468 1403.5,3468 1403.5,3883 1073.5,3883
  pour cut-out: 2570,3468 2900,3468 2900,3883 2570,3883
  pour cut-out: 2525,4332.5 2855,4332.5 2855,4747.5 2525,4747.5